# EAGLE board WiFi_UART_Board_R1_0 (EAGLE 6.6.0)
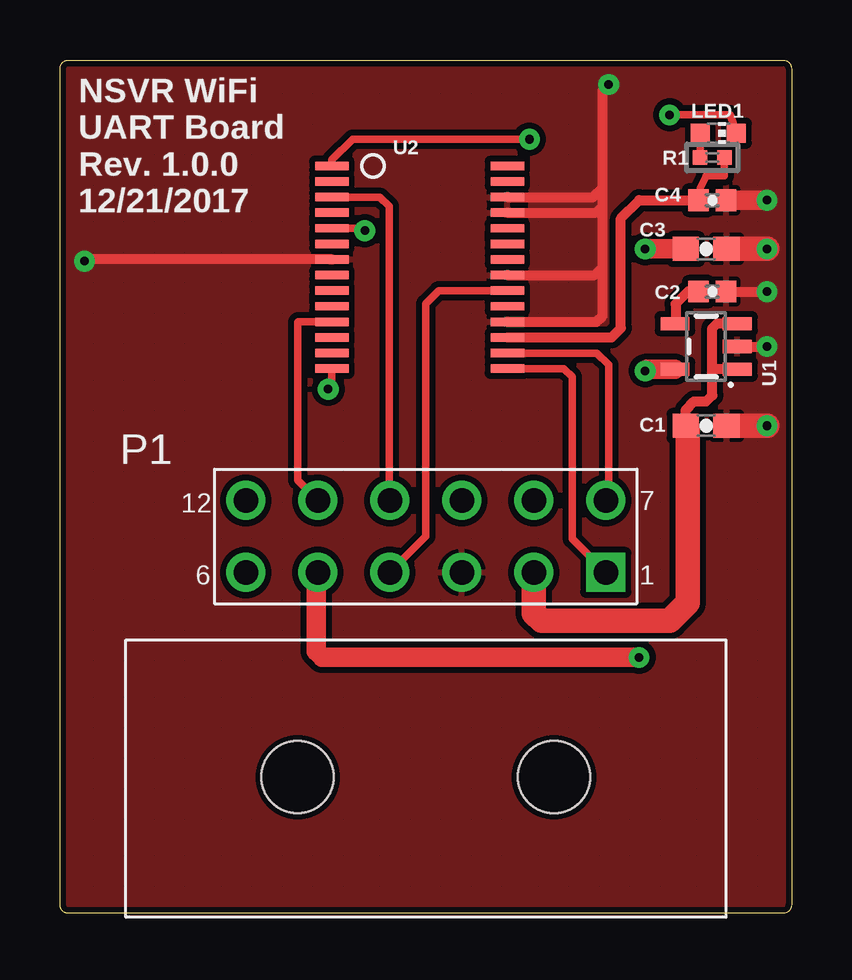
[diagram p0: board, top side]
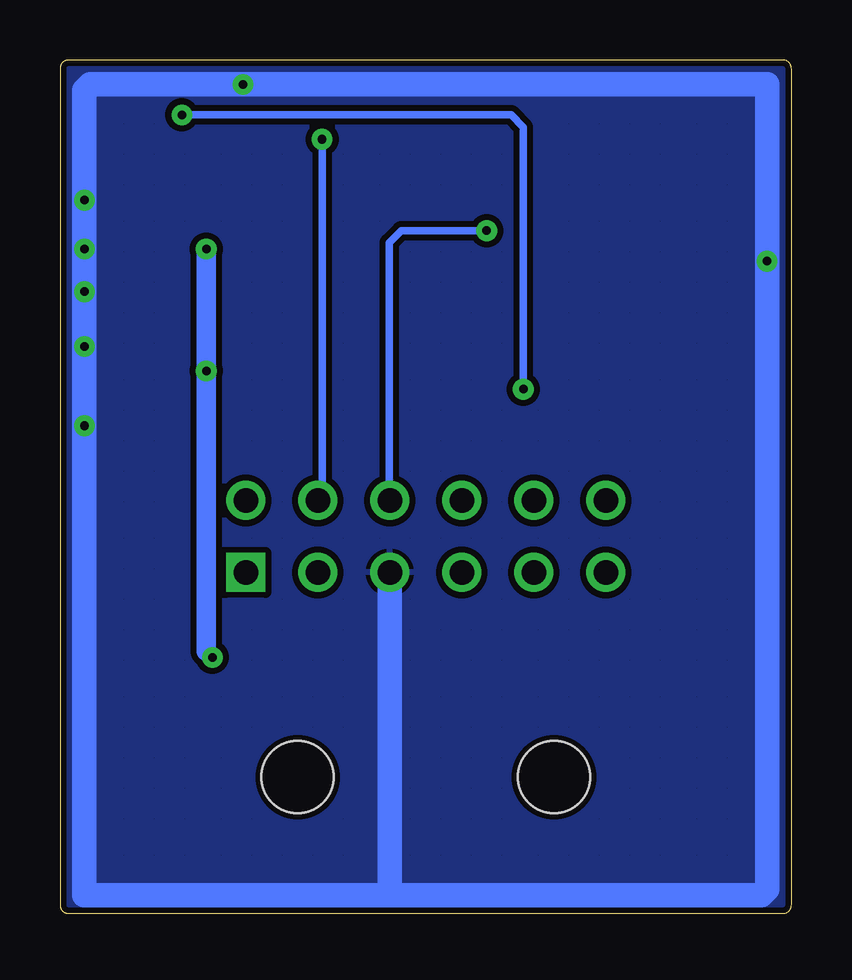
[diagram p1: board, bottom side, seen from below]

Size 30.48 x 35.56 mm. Coordinates in mm from the lower left corner, seen from the top.
Outline: 0.36,35.56 30.12,35.56 arc-90 30.48,35.2 30.48,0.36 arc-90 30.12,0 0.36,0 arc-90 0,0.36 0,35.2 arc-90 0.36,35.56
Copper layers (1*16): Top 0.035mm / dielectric 1.5mm / Bottom 0.035mm
Design rules "PatternAgents_7mil": minimum track width 7mil, minimum drill 14mil, track to track 7mil, track to pad 7mil, pad to pad 7mil, via to via 7mil, smd to smd 7mil, copper to edge 7mil, drill to drill 7mil, minimum pad ring 12mil, minimum via ring 10mil, stop-mask expansion 4mil, vias tented up to drill 25mil, thermal gap 7mil

## Footprints (pad centres in the part's own frame; a part is rotated, then mirrored left to right if it is on the bottom)
0603-CAP = smd 1.1 x 1: 1 -0.85,0; 2 0.85,0
0402-CAP = smd 0.85 x 0.9: 1 -0.58,0; 2 0.58,0
CHIP-LED0603 = smd 0.8 x 0.8: A 0,-0.75; C 0,0.75
MOLEX_44428-1201 = drill 1.02 square: 1 7.5,5.065 | drill 1.02: 2 4.5,5.065; 3 1.5,5.065; 4 -1.5,5.065; 5 -4.5,5.065; 6 -7.5,5.065; 7 7.5,8.065; 8 4.5,8.065; 9 1.5,8.065; 10 -1.5,8.065; 11 -4.5,8.065; 12 -7.5,8.065 | hole 3: -5.34,-3.465; 5.34,-3.465
EIA-0402 = smd 0.6 x 0.6: 1 -0.508,0; 2 0.508,0
SOT23-5 = smd 0.55 x 1.2: 1 -0.95,-1.3; 2 0,-1.3; 3 0.95,-1.3; 4 0.95,1.3; 5 -0.95,1.3
SSOP28DB = smd 0.348 x 1.397: 1 -4.225,-3.656; 2 -3.575,-3.656; 3 -2.925,-3.656; 4 -2.275,-3.656; 5 -1.625,-3.656; 6 -0.975,-3.656; 7 -0.325,-3.656; 8 0.325,-3.656; 9 0.975,-3.656; 10 1.625,-3.656; 11 2.275,-3.656; 12 2.925,-3.656; 13 3.575,-3.656; 14 4.225,-3.656; 15 4.225,3.656; 16 3.575,3.656; 17 2.925,3.656; 18 2.275,3.656; 19 1.625,3.656; 20 0.975,3.656; 21 0.325,3.656; 22 -0.325,3.656; 23 -0.975,3.656; 24 -1.625,3.656; 25 -2.275,3.656; 26 -2.925,3.656; 27 -3.575,3.656; 28 -4.225,3.656

## Placement (x,y rotation side)
C1  10uF  [0603-CAP]  26.92,20.32 0 top
C2  470pF  [0402-CAP]  27.18,25.91 0 top
C3  10uF  [0603-CAP]  26.92,27.69 0 top
C4  100nF  [0402-CAP]  27.18,29.72 0 top
LED1  [CHIP-LED0603]  27.43,32.51 270 top
P1  44428-1201  [MOLEX_44428-1201]  15.24,9.14 0 top
R1  1K  [EIA-0402]  27.18,31.5 0 top
U1  3.3V/150mA  [SOT23-5]  26.92,23.62 90 top
U2  FT232RL  [SSOP28DB]  14.99,26.92 270 top

## Library data of the parts
C1-C4 R1 = PatternAgents-ProtoPads
LED1 = led
P1 = 44428-1201; AVAILABILITY: Good; DESCRIPTION: Conn Wire to Board HDR 12 POS 3mm Solder RA Thru-Hole Micro-Fit 3.0 BMI? Tray; MF: Molex; MP: 44428-1201; PACKAGE: None; PRICE: 2.39 USD
U1 = SparkFun-PowerIC; PROD_ID: VREG-00822
U2 = ftdichip-3

## Nets
3V3_EXT: C3.1 P1.5 U1.5
3V3_FTDI: C4.1 R1.2 U2.17
5V0: P1.4 U2.20
!PWREN0: LED1.C U2.14
!RST: U2.19
!RXLED0: U2.22
!SLEEP0: U2.12
!TXDEN0: U2.13
!TXLED0: U2.23
CTS0: P1.10 U2.3
DCD0: U2.10
DSR0: U2.2
DTR0: U2.9
GND: C1.2 C2.2 C3.2 C4.2 P1.3 U1.2 U2.7 U2.18 U2.21 U2.25 U2.26
N$1: LED1.A R1.1
N$7: C2.1 U1.4
OSCI_FTDI: U2.27
OSCO_FTDI: U2.28
RI0: U2.6
RTS0: P1.11 U2.11
RXD0: P1.8 U2.1
SC5: P1.6
SD5: P1.12
TXD0: P1.9 U2.5
USB_DM: P1.7 U2.16
USB_DP: P1.1 U2.15
VDD: U2.4
VIN_DC: C1.1 P1.2 U1.1 U1.3

## Tracks (layer width: path | path; a pad name or v marks a point on that pad's centre or on a via)
3V3_EXT  (via drill 0.36)
  Top 0.813: C3.1 v24.38,27.69 | v24.13,10.67 10.92,10.67 10.67,10.92 10.67,14.14 P1.5 | U1.5 24.45,22.67 v24.38,22.61
  Bottom 0.813: v24.38,27.69 v24.38,22.61 24.38,10.92 v24.13,10.67
3V3_FTDI
  Top 0.305: R1.2 27.69,30.73 26.92,30.73 26.67,30.23 26.67,29.79 C4.1
  Top 0.406: U2.17 22.98,24 23.37,24.38 23.37,28.96 24.13,29.72 C4.1
5V0
  Top 0.305: U2.20 15.79,25.95 15.24,25.4 15.24,15.71 P1.4
!PWREN0  (via drill 0.36)
  Top 0.305: U2.14 11.33,22 v11.18,21.84 | v25.4,33.27 27.93,33.27 LED1.C
  Bottom 0.305: v11.18,21.84 11.18,32.77 11.68,33.27 v25.4,33.27
CTS0
  Top 0.305: U2.3 13.33,29.85 13.72,29.46 13.72,17.23 P1.10
GND  (via drill 0.36)
  Top 0.406: U1.2 v29.46,23.62 | C2.2 v29.46,25.91 | U2.7 1.09,27.25 v1.02,27.18 | U2.18 22.36,24.65 22.61,24.89 22.61,26.92 | 22.61,26.92 22.61,29.46 | 22.61,29.46 22.61,30.23 | 22.61,30.23 22.61,34.29 v22.86,34.54 | U2.26 22.23,29.85 22.61,30.23 | U2.25 22.34,29.2 22.61,29.46 | U2.21 22.28,26.6 22.61,26.92
  Top 0.813: C4.2 v29.46,29.72
  Top 1.016: C3.2 v29.46,27.69 | C1.2 v29.46,20.32
  Bottom 0.813: v29.46,29.72 29.46,31.75
  Bottom 1.016: P1.3 16.74,0.79 16.76,0.76 | 16.76,0.76 1.27,0.76 1.02,1.02 v1.02,27.18 1.02,34.54 v22.86,34.54 29.21,34.54 29.46,34.29 v29.46,29.72 v29.46,27.69 v29.46,25.91 v29.46,23.62 v29.46,20.32 29.46,0.76 16.76,0.76
  pour Top (isolate 0.254, hatched): 0,0 0,35.56 30.48,35.56 30.48,0
  pour Bottom (isolate 0.254, hatched): 0,0 0,35.56 30.48,35.56 30.48,0
N$1
  Top 0.305: LED1.A 26.68,31.51 R1.1
N$7
  Top 0.406: C2.1 26.16,25.91 25.65,25.4 25.65,24.6 U1.4
RTS0
  Top 0.305: U2.11 9.92,24.65 9.91,24.64 9.91,18.04 P1.11
RXD0  (via drill 0.36)
  Top 0.305: U2.1 11.33,31.4 12.19,32.26 v19.56,32.26
  Bottom 0.305: v19.56,32.26 19.56,17.39 P1.8
TXD0  (via drill 0.36)
  Top 0.305: U2.5 12.6,28.55 v12.7,28.45
  Bottom 0.305: v12.7,28.45 16.26,28.45 16.76,27.94 16.76,17.23 P1.9
USB_DM
  Top 0.305: U2.16 22.37,23.35 22.86,22.86 22.86,17.33 P1.7
USB_DP
  Top 0.305: U2.15 20.99,22.7 21.34,22.35 21.34,15.61 P1.1
VIN_DC
  Top 0.406: C1.1 26.07,20.99 26.42,21.34 26.92,21.34 27.18,21.59 27.18,22.61 | 27.18,22.61 27.18,24.38 27.37,24.57 U1.3 | U1.1 27.24,22.67 27.18,22.61
  Top 1.016: P1.2 19.74,12.52 20.07,12.19 25.4,12.19 26.16,12.95 26.16,20.23 C1.1

## Text on the board
tPlace: NSVR WiFi / UART Board / Rev. 1.0.0 / 12/21/2017